# Altium PCB ByggernPCB_R01.PcbDoc
Units mm, origin at the board's own origin, x right, y up, seen from the top; angles counter-clockwise.
Board outline 121.2 x 94.85 mm, 2 copper layers (Top Layer, Bottom Layer), stack 0.325 mm thick; 47 components, 72 nets, 293 pads, 0 vias.
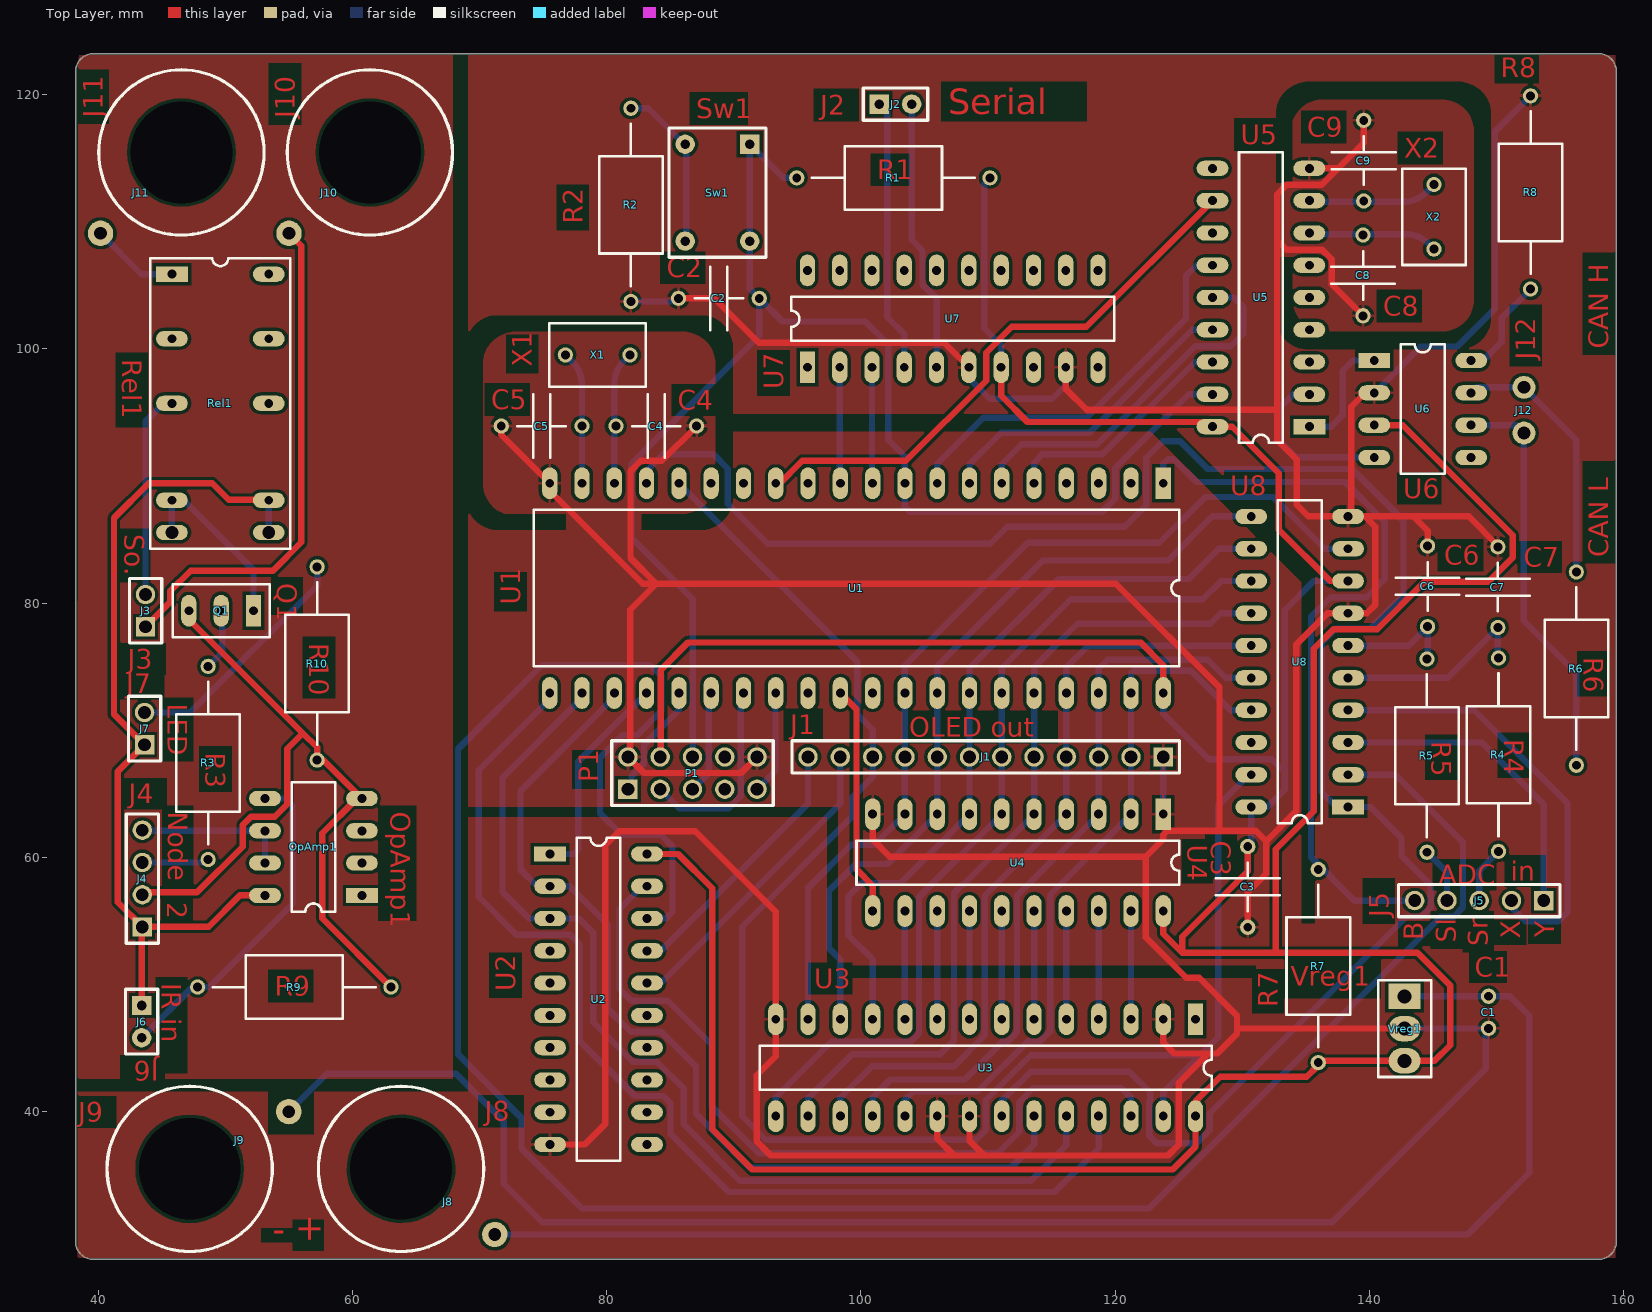
[diagram p0: Top Layer view]
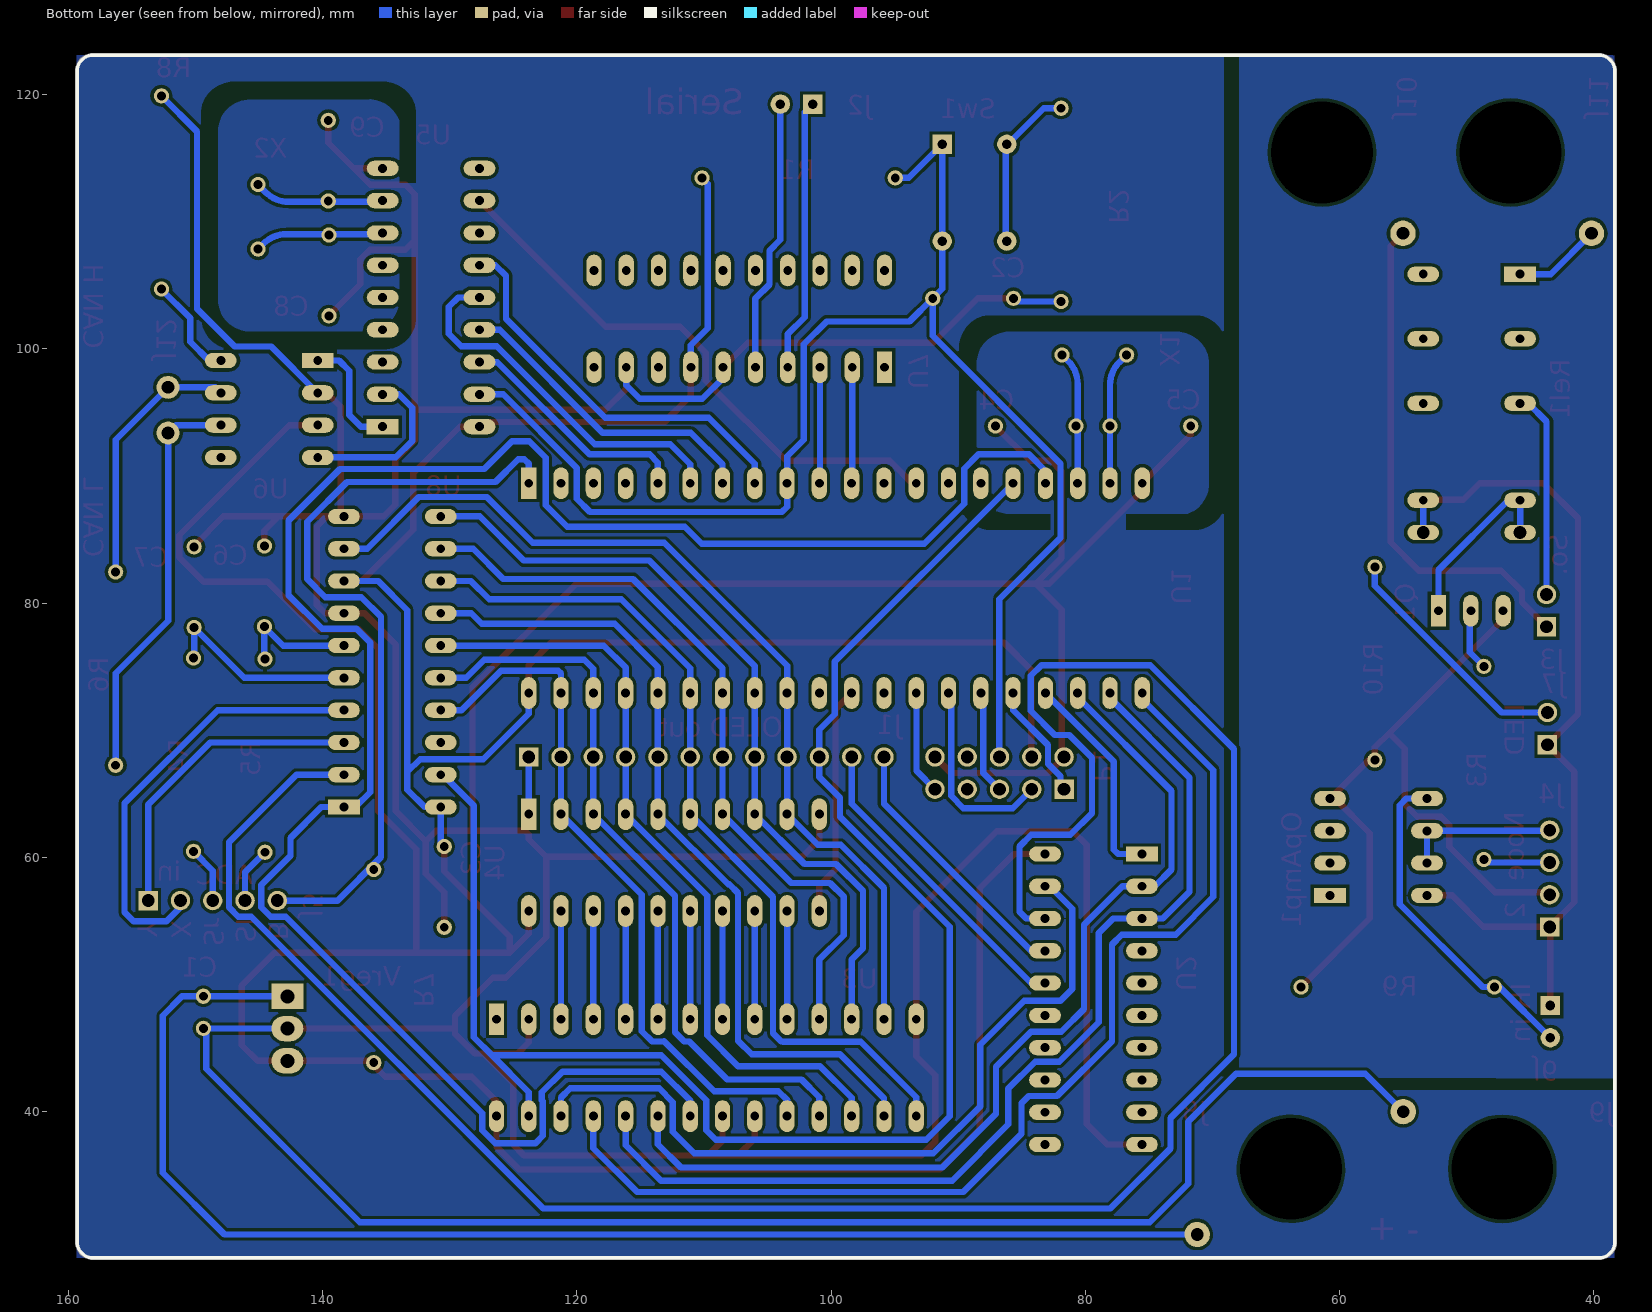
[diagram p1: Bottom Layer view, seen from below]

## Layer stack, top to bottom
Top Layer: signal copper 0.0356
Dielectric 1: core 0.254, FR-4, Dk 4.2
Bottom Layer: signal copper 0.0356

## Board outline
38.223,29.734 ccw(c39.62,29.77) 39.62,28.373 ccw(c39.62,28.5) 39.658,28.378 ccw(c39.695,28.5) 39.695,28.373 158.03,28.373 ccw(c158.03,29.77) 159.427,29.77 159.427,121.83 ccw(c158.03,121.83) 158.03,123.227 39.62,123.227 ccw(c39.62,121.83) 38.223,121.83 38.223,29.745 ccw(c38.35,29.745)

## Design rules (kind name [scope] priority, off if disabled: settings)
Clearance [All] p1: gap=0.254 ignorepadtopadclearanceinfootprint=FALSE except(0: Arc-Hole Track-Hole SMDPad-Hole THPad-Hole Via-Hole Fill-Hole Poly-Hole Region-Hole Text-Hole)
PolygonConnect [All] p1: connectstyle=Relief reliefconductorwidth=0.254 reliefentries=4 polygonreliefangle="90 Angle" airgapwidth=0.254
RoutingVias [All] p1: holewidth=0.711 width=1.27 viastyle="Through Hole" minholewidth=0.711 minwidth=1.27 maxholewidth=0.711 maxwidth=1.27
SolderMaskExpansion [All] p1: expansion=0.102
Width Width_1 [All] p1: maxlimit=1 minlimit=0.254 preferedwidth=0.5 minimp=50.000000 maximp=50.000000 favimp=50.000000
Width [All] p2: maxlimit=0.254 minlimit=0.254 preferedwidth=0.254
30 further rules are at their usual default settings.

## Components (designator, comment, footprint, x,y, rotation, side; value= is the part's Value field where it differs from the comment)
C1 "1uF" Capacitor#1 149.374,49.074 r270 top
C2 "100nF" Capacitor#2 92,103.975 r180 top
C3 "100nF" Capacitor#2 130.425,60.85 r270 top
C4 "22pF" Capacitor#2 80.725,93.925 r0 top
C5 "22pF" Capacitor#2 78.06,93.925 r180 top
C6 "100nF" Capacitor#2 144.575,78.15 r90 top
C7 "100nF" Capacitor#2 150.1,78.075 r90 top
C8 "22pF" Capacitor#2 139.5,108.95 r270 top
C9 "22pF" Capacitor#2 139.55,111.625 r90 top
J1 "Display" Header12 123.78,67.9 r180 top
J2 "Serial" Header2#1 101.45,119.25 r0 top
J3 "Solonoide" Header2#2 43.725,78.135 r90 top
J4 "Node2" Header4 43.475,54.52 r90 top
J5 "5 pin header" Header5 153.715,56.6 r180 top
J6 "IR In" Header2#1 43.425,48.35 r270 top
J7 "IR Out" Header2#2 43.65,68.86 r90 top
J8 "Banana" Banana-plug 63.825,35.5 r325 top
J9 "Banana" Banana-plug 47.2,35.5 r30 top
J10 "Banana" Banana-plug 61.375,115.45 r225 top
J11 "Banana" Banana-plug 46.55,115.45 r225 top
J12 "Screw-terminal" "Screw connector" 152.15,93.375 r90 top
OpAmp1 "MCP602" DIP8 60.745,57.01 r180 top
P1 "JTAG Header" Header5x2 81.67,65.36 r0 top
Q1 "MPSA56" SIP3#1 52.215,79.4 r270 top
R1 "10K" "Axial 0.6" 110.15,113.45 r180 top
R2 "100K" "Axial 0.6" 81.9,103.725 r90 top
R3 "1K" "Axial 0.6" 48.65,59.825 r90 top
R4 "2K" "Axial 0.6" 150.15,60.475 r90 top
R5 "2K" "Axial 0.6" 144.525,60.4 r90 top
R6 "120R" "Axial 0.6" 156.275,82.45 r270 top
R7 "10K" "Axial 0.6" 135.975,59.05 r270 top
R8 "10K" "Axial 0.6" 152.675,104.7 r90 top
R9 "1M" "Axial 0.6" 47.825,49.8 r0 top
R10 "47R" "Axial 0.6" 57.225,67.65 r90 top
Rel1 "5V Relay" DIP16-8 45.8,88.095 r0 top
Sw1 "Microswitch" Microswitch 88.715,113.555 r270 top
U1 "Atmega162" DIP40 123.78,89.431 r270 top
U2 "GAL" DIP20 75.55,60.27 r0 top
U3 "8Kx8 SRAM" DIP28 126.32,47.267 r270 top
U4 "Octal D Latch" DIP20 123.78,63.396 r270 top
U5 "CAN Controller" DIP18 135.275,93.88 r180 top
U6 "CAN Tranciever" DIP8 140.38,99.08 r0 top
U7 "Maxim RS232 Tranciever" DIP20 95.79,98.55 r90 top
U8 "8-bit ADC" DIP20 138.32,63.96 r180 top
Vreg1 "5V regulator" SIP3#2 142.766,49.074 r0 top
X1 "4.9152 MHz" Crystal 81.83,99.525 r180 top
X2 "16 MHz" Crystal 145.075,107.845 r90 top

## Footprints (in the part's own frame and the unit in brackets; to place one, negate y for a bottom-side part, rotate by r counter-clockwise, add the part's x,y. Pads: shape width x height; smd on the part's side, far side on the other; paste and mask are expansions set on the pad)
"Axial 0.6" [mm]
  round 1.2 hole 0.7: 1(0,0) 2(15.2,0)
  silkscreen extent 1.2,-2.5 14,2.5
Banana-plug [mm]
  round 2 hole 1: 1(9,0)
  round 0 hole 8: ""(0,0)
  silkscreen extent -6.5,-6.5 6.5,6.5
Capacitor#1 [mm]
  round 1.2 hole 0.7: 1(0,0) 2(2.525,0)
Capacitor#2 [mm]
  round 1.2 hole 0.7: 1(0,0) 2(6.35,0)
  silkscreen extent 1.27,-2.5 5.08,2.5
Crystal [mm]
  round 1.2 hole 0.7: 1(0,0) 2(5.08,0)
  silkscreen extent -1.25,-2.5 6.33,2.5
DIP8 [mm]
  rect 2.5x1.2 hole 0.7: 1(0,0)
  oval 2.5x1.2 hole 0.7: 2(0,-2.54) 3(0,-5.08) 4(0,-7.62) 5(7.62,-7.62) 6(7.62,-5.08) 7(7.62,-2.54) 8(7.62,0)
  silkscreen extent 2.08,-8.89 5.54,1.27
DIP16-8 [mm]
  rect 2.5x1.2 hole 0.7: 1(0,17.78)
  oval 2.5x1.2 hole 0.7: 2(0,12.7) 3(0,7.62) 4(0,0) 5(7.62,0) 6(7.62,7.62) 7(7.62,12.7) 8(7.62,17.78)
  oval 2.5x1.2 hole 1: 4(0,-2.54) 5(7.62,-2.54)
  silkscreen extent -1.69,-3.81 9.31,19.05
DIP18 [mm]
  rect 2.5x1.2 hole 0.7: 1(0,0)
  oval 2.5x1.2 hole 0.7: 2(0,-2.54) 3(0,-5.08) 4(0,-7.62) 5(0,-10.16) 6(0,-12.7) 7(0,-15.24) 8(0,-17.78) 9(0,-20.32) 10(7.62,-20.32) 11(7.62,-17.78) 12(7.62,-15.24) 13(7.62,-12.7) 14(7.62,-10.16) 15(7.62,-7.62) 16(7.62,-5.08) 17(7.62,-2.54) 18(7.62,0)
  silkscreen extent 2.08,-21.59 5.54,1.27
DIP20 [mm]
  rect 2.5x1.2 hole 0.7: 1(0,0)
  oval 2.5x1.2 hole 0.7: 2(0,-2.54) 3(0,-5.08) 4(0,-7.62) 5(0,-10.16) 6(0,-12.7) 7(0,-15.24) 8(0,-17.78) 9(0,-20.32) 10(0,-22.86) 11(7.62,-22.86) 12(7.62,-20.32) 13(7.62,-17.78) 14(7.62,-15.24) 15(7.62,-12.7) 16(7.62,-10.16) 17(7.62,-7.62) 18(7.62,-5.08) 19(7.62,-2.54) 20(7.62,0)
  silkscreen extent 2.08,-24.13 5.54,1.27
DIP28 [mm]
  rect 2.5x1.2 hole 0.7: 1(0,0)
  oval 2.5x1.2 hole 0.7: 2(0,-2.54) 3(0,-5.08) 4(0,-7.62) 5(0,-10.16) 6(0,-12.7) 7(0,-15.24) 8(0,-17.78) 9(0,-20.32) 10(0,-22.86) 11(0,-25.4) 12(0,-27.94) 13(0,-30.48) 14(0,-33.02) 15(7.62,-33.02) 16(7.62,-30.48) 17(7.62,-27.94) 18(7.62,-25.4) 19(7.62,-22.86) 20(7.62,-20.32) 21(7.62,-17.78) 22(7.62,-15.24) 23(7.62,-12.7) 24(7.62,-10.16) 25(7.62,-7.62) 26(7.62,-5.08) 27(7.62,-2.54) 28(7.62,0)
  silkscreen extent 2.08,-34.29 5.54,1.27
DIP40 [mm]
  rect 2.5x1.2 hole 0.7: 1(0,0)
  oval 2.5x1.2 hole 0.7: 2(0,-2.54) 3(0,-5.08) 4(0,-7.62) 5(0,-10.16) 6(0,-12.7) 7(0,-15.24) 8(0,-17.78) 9(0,-20.32) 10(0,-22.86) 11(0,-25.4) 12(0,-27.94) 13(0,-30.48) 14(0,-33.02) 15(0,-35.56) 16(0,-38.1) 17(0,-40.64) 18(0,-43.18) 19(0,-45.72) 20(0,-48.26) 21(16.5,-48.26) 22(16.5,-45.72) 23(16.5,-43.18) 24(16.5,-40.64) 25(16.5,-38.1) 26(16.5,-35.56) 27(16.5,-33.02) 28(16.5,-30.48) 29(16.5,-27.94) 30(16.5,-25.4) 31(16.5,-22.86) 32(16.5,-20.32) 33(16.5,-17.78) 34(16.5,-15.24) 35(16.5,-12.7) 36(16.5,-10.16) 37(16.5,-7.62) 38(16.5,-5.08) 39(16.5,-2.54) 40(16.5,0)
  silkscreen extent 2.08,-49.53 14.42,1.27
Header2#1 [mil]
  rect 60x60 hole 30: 1(0,0)
  round 60 hole 30: 2(100,0)
  silkscreen extent -50,-50 150,50
Header2#2 [mil]
  rect 60x60 hole 39.37: 1(0,0)
  round 60 hole 39.37: 2(100,0)
  silkscreen extent -50,-50 150,50
Header4 [mil]
  rect 60x60 hole 39.37: 1(0,0)
  round 60 hole 39.37: 2(100,0) 3(200,0) 4(300,0)
  silkscreen extent -50,-50 350,50
Header5 [mil]
  rect 60x60 hole 39.37: 1(0,0)
  round 60 hole 39.37: 2(100,0) 3(200,0) 4(300,0) 5(400,0)
  silkscreen extent -50,-50 450,50
Header5x2 [mil]
  rect 60x60 hole 39.37: 1(0,0)
  round 60 hole 39.37: 2(0,100) 3(100,0) 4(100,100) 5(200,0) 6(200,100) 7(300,0) 8(300,100) 9(400,0) 10(400,100)
  silkscreen extent -50,-50 450,150
Header12 [mil]
  rect 60x60 hole 39.37: 1(0,0)
  round 60 hole 39.37: 2(100,0) 3(200,0) 4(300,0) 5(400,0) 6(500,0) 7(600,0) 8(700,0) 9(800,0) 10(900,0) 11(1000,0) 12(1100,0)
  silkscreen extent -50,-50 1150,50
Microswitch [mil]
  rect 60x60 hole 30: 1(-100,100)
  round 60 hole 30: 1(200,100) 2(-100,-100) 2(200,-100)
  silkscreen extent -150,-150 250,150
"Screw connector" [mm]
  round 1.8 hole 1: 1(0,0) 2(3.6,0)
SIP3#1 [mm]
  rect 2.5x1.2 hole 0.7: 1(0,0)
  oval 2.5x1.2 hole 0.7: 2(0,-2.54) 3(0,-5.08)
  silkscreen extent -2.08,-6.35 2.08,1.27
SIP3#2 [mm]
  rect 2.5x2 hole 1.1: 1(0,0)
  oval 2.5x2 hole 1.1: 2(0,-2.54) 3(0,-5.08)
  silkscreen extent -2.08,-6.35 2.08,1.27

## Part data
C1 C2 C3 C4 C5 C6 C7 C8 C9: library part GenericCapacitor
J1: library part Header12
J2: library part Header2, PackageDocument=O, DatasheetDocument=1-Sep-1999, Gender=Receptacle, LatestRevisionDate=17-Jul-2002, LatestRevisionNote="Re-released for DXP Platform.", Orientation="Right Angle", PackageReference=788750, Positions=9, Published=15-Jun-2001, Publisher="Altium Limited"
J3 J6 J7: library part Header2
J4: library part Header4
J5: library part Header5
R1 R2 R3 R4 R5 R6 R7 R8 R9 R10: library part GenericResistor
Rel1: library part Relay
U2: library part GAL16V8
U3: library part IDT_7164SL
U4: library part SN74ALS573C
U5: library part MCP2515
U6: library part MCP2551
U7: library part MAX233
U8: library part ADC0844CCN
Vreg1: library part MC7805
X1 X2: library part GenericCrystal

## Nets (pads, with @x,y where several pads share a name; then routed paths per layer and width w, separated by ;. In a path a pad name is that pad's centre, name@x,y a point inside that pad or via, vN(x,y) a via of type N, cw(c..) or ccw(c..) an arc to the next point about the centre after c; other vN are vias at no path point)
0Vn2: J4.2 OpAmp1.4 Q1.3 R9.2 R10.1 | length 60.7
  Top Layer w0.5: J4.2 43.665,57.25 47.775,57.25 51.371,60.846 51.371,62.547 52.018,63.194 53.9,63.194 54.879,64.173 54.879,68.546 56.104,69.771 57.225,68.65 R10.1 57.725,67.65 OpAmp1.4 60.355,64.63 57.625,61.9 57.625,55.2 R9.2 ; Q1.3 47.135,78.74 56.1,69.775
5V: C3.1 P1.4 R1.1 R7.2 U1.40 U2.20 U3.28 U4.20 U5.18 U6.3 U7.7 U8.8 U8.20 Vreg1.3 | length 335.3
  Top Layer w0.5: U2.20 85.605,60.27 88.3,57.575 88.3,38.6 91.45,35.45 124.525,35.45 126.32,37.245 U3.28 126.32,40.82 128.25,42.75 135.075,42.75 R7.2@135.919,43.594 ; P1.4 84.244,67.934 84.244,74.744 86.4,76.9 122,76.9 123.78,75.12 U1.40 ; R1.1@109.926,113.226 R1.1 ; U7.7 111.03,96.32 113.1,94.25 127.285,94.25 U5.18 129.22,93.88 132.875,90.225 132.875,85.775 136.91,81.74 U8.8 ; U4.20 123.78,53.995 125.275,52.5 ; C3.1 130.425,58.9 125.275,53.75 125.275,52.5 ; R7.2@135.975,43.994 Vreg1.3 145.119,43.994 146.35,45.225 146.35,49.925 143.775,52.5 132.575,52.5 ; U6.3 142.621,94 151.275,85.346 151.275,83.583 149.367,81.675 144.325,81.675 140.6,77.95 137.175,77.95 135.625,76.4 135.625,63.625 132.629,60.629 132.629,52.554 132.575,52.5 ; 125.275,52.5 132.575,52.5
  Bottom Layer w0.5: R1.1@109.926,113.226 109.7,113 109.7,101.625 111.03,100.295 U7.7 ; U1.40 123.78,71.295 127.35,67.725 132.325,67.725 133.325,66.725 ; C3.1 130.7,61.125 U8.20 131.96,63.96 133.325,65.325 133.325,66.725 ; U8.8 135.615,81.74 133.325,79.45 133.325,66.725
5Vn2: J4.1 J6.1 J7.1 OpAmp1.8 Rel1.5 | length 68.5
  Top Layer w0.5: J6.1 43.425,54.47 J4.1 J4.1@43.49,54.535 ; OpAmp1.8 51.16,57.01 48.685,54.535 J4.1@43.49,54.535 ; Rel1.5@53.875,88.125 50.275,88.125 48.975,89.425 43.975,89.425 41.242,86.692 41.242,71.268 J7.1 41.55,66.76 41.55,56.475 J4.1@43.49,54.535
  Bottom Layer w0.5: Rel1.5@53.42,85.555 Rel1.5@53.42,88.095
ADC_CS: U2.18 U8.2 | length 182.4
  Bottom Layer w0.5: U2.18 84.64,55.19 85.175,55.725 85.175,60.85 84.25,61.775 81.175,61.775 79.475,63.475 79.475,67.825 81.275,69.625 82.4,69.625 84.3,71.525 84.3,74.275 83.45,75.125 74.9,75.125 68.3,68.525 68.3,44.5 73.3,39.5 73.3,37.1 78.025,32.375 122.65,32.375 145.609,55.334 146.619,55.334 147.339,56.054 147.35,56.054 147.361,56.065 147.361,61.189 142.05,66.5 U8.2
CAN_CLK: U1.8 U5.13 | length 31.6
  Bottom Layer w0.5: U1.8 106,90.95 109.625,94.575 117.775,94.575 125.575,102.375 125.575,105.75 126.405,106.58 U5.13
CAN_CS: U1.5 U5.16 | length 18.9
  Bottom Layer w0.5: U1.5 113.62,91.045 114.275,91.7 119,91.7 126.26,98.96 U5.16
CAN_RX0BF: U1.13 U5.11 | length 45.1
  Top Layer w0.5: U1.13@93.1,89.325 93.523,89.325 95.383,91.185 103.535,91.185 109.85,97.5 109.85,99.705 111.87,101.725 117.725,101.725 127.655,111.655 U5.11
CAN_SI: U1.6 U5.14 | length 29.6
  Bottom Layer w0.5: U1.6 111.08,90.93 112.65,92.5 118.6,92.5 126.3,100.2 129.1,100.2 130.075,101.175 130.075,103.3 129.335,104.04 U5.14
CAN_SO: U1.7 U5.15 | length 25
  Bottom Layer w0.5: U1.7 108.54,90.915 111.025,93.4 117.975,93.4 126.075,101.5 U5.15
GND: C1.2 C2.2 C3.2 C4.2 C5.2 C6.2 C7.2 C8.2 C9.2 J1.1 J9.1 P1.2 P1.10 R2.1 R8.2 U1.20 U2.10 U3.2 U3.14 U3.20 U3.21 U4.1 U4.10 U5.9 U6.2 U7.6 U7.9 U8.7 U8.10 Vreg1.2 | length 632.4
  Top Layer w0.5: C5.2 71.71,93.241 U1.20 75.52,88.83 82.825,81.525 83.9,81.525 ; U2.10 78.285,37.41 79.9,39.025 79.9,60.975 80.975,62.05 86.975,62.05 93.3,55.725 U3.14 93.3,44.35 91.8,42.85 91.8,37.65 92.9,36.55 107.325,36.55 ; C2.2 88.45,103.975 91.95,100.475 106.565,100.475 U7.6 ; C4.2 84.335,91.185 82.683,91.185 81.875,90.377 81.875,83.55 83.9,81.525 ; P1.10 90.564,66.634 82.936,66.634 P1.2 81.85,68.08 81.85,79.475 83.9,81.525 ; U4.10 100.92,61.405 102.275,60.05 122.4,60.05 ; U3.20 106,37.875 107.325,36.55 ; U3.21 108.54,37.71 109.7,36.55 ; U7.9 116.11,96.84 117.75,95.2 132.75,95.2 ; U3.2 123.78,45.445 124.65,44.575 127.325,44.575 ; C3.2 130.425,57.25 131.875,58.7 131.875,61.275 ; U5.9 137.55,114.2 ; C8.2 137.029,105.071 137.029,107.037 136.266,107.8 133.5,107.8 132.75,108.55 ; C9.2 139.55,116.2 137.55,114.2 ; U6.2 139.665,96.54 138.575,95.45 138.575,87.075 U8.10 135.18,86.82 134.275,87.725 134.275,91.3 132.75,92.825 132.75,95.2 ; Vreg1.2 129.584,46.534 ; C6.2 144.575,85.7 143.455,86.82 ; C7.2 150.1,84.525 147.805,86.82 143.455,86.82 ; 83.9,81.525 120.05,81.525 128.2,73.375 128.2,62.1 ; 107.325,36.55 109.7,36.55 ; 109.7,36.55 124.15,36.55 125,37.4 125,42.25 127.325,44.575 ; 122.4,60.05 122.4,53.725 125.6,50.525 126.6,50.525 129.584,47.541 129.584,46.534 ; 122.4,60.05 123.78,61.43 123.78,61.775 124.105,62.1 128.2,62.1 ; 127.325,44.575 128.025,44.575 129.584,46.134 129.584,46.534 ; 128.2,62.1 131.05,62.1 131.875,61.275 ; 131.875,61.275 134.25,63.65 134.25,76.75 136.7,79.2 U8.7 139.8,79.2 140.45,79.85 140.45,85.995 139.625,86.82 143.455,86.82 ; 132.75,95.2 132.75,108.55 ; 132.75,108.55 132.75,112.175 133.475,112.9 136.25,112.9 137.55,114.2
  Bottom Layer w0.5: J9.1 57.969,42.975 68.15,42.975 71.9,39.225 71.9,34.325 74.925,31.3 137.075,31.3 149.159,43.384 149.159,46.534 Vreg1.2 ; R2.1 85.4,103.725 C2.2 ; U7.6 108.49,97.71 110.125,96.075 115.05,96.075 116.11,97.135 U7.9 ; U4.1 J1.1 ; U6.2 140.403,96.54 144.047,100.184 146.909,100.184 149.875,103.15 149.875,117.1 R8.2
JoyButton: J5.5 R7.1 U1.1 | length 61.2
  Bottom Layer w0.5: U1.1 123.78,90.98 124.125,91.325 124.6,91.325 126.4,89.525 138.075,89.525 141.2,86.4 141.2,81.9 139.775,80.475 136.95,80.475 135.4,78.925 135.4,60.025 138.825,56.6 J5.5
NetC1_1: C1.1 J8.1 Vreg1.1 | length 106.2
  Bottom Layer w0.5: J8.1 147.713,30.338 152.575,35.2 152.575,47.55 151.051,49.074 C1.1 Vreg1.1
NetC4_1: C4.1 U1.18 X1.1 | length 10.5
  Bottom Layer w0.5: U1.18 80.6,97.243 cw(c83.14,97.243) 81.344,99.039 X1.1
NetC5_1: C5.1 U1.19 X1.2 | length 10.5
  Bottom Layer w0.5: X1.2 77.316,98.959 cw(c75.52,97.163) 78.06,97.163 C5.1 U1.19
NetC6_1: C6.1 R5.2 U8.6 | length 9.4
  Bottom Layer w0.5: U8.6 143.085,76.66 C6.1 144.575,75.65 R5.2
NetC7_1: C7.1 R4.2 U8.5 | length 15.8
  Bottom Layer w0.5: U8.5 146.145,74.12 C7.1 150.1,75.725 R4.2
NetC8_1: C8.1 U5.7 X2.1 | length 10.4
  Bottom Layer w0.5: U5.7@135.075,109.02 142.848,109.02 cw(c142.848,106.48) 144.644,108.276 X2.1
NetC9_1: C9.1 U5.8 X2.2 | length 9.9
  Bottom Layer w0.5: U5.8@135.6,111.56 142.658,111.56 ccw(c142.658,114.1) 144.454,112.304 X2.2
NetJ1_2: J1.2 U1.39 U3.19 U4.2 U8.17 | length 56.6
  Bottom Layer w0.5: U3.19 103.46,40.91 104.15,41.6 109.2,41.6 113.138,45.538 113.163,45.513 114.077,45.513 114.9,46.336 114.9,57.056 U4.2 J1.2 U1.39 121.24,74.465 121.46,74.685 125.965,74.685 129.07,71.58 U8.17
NetJ1_3: J1.3 U1.38 U3.18 U4.3 U8.16 | length 59.1
  Bottom Layer w0.5: U3.18 100.92,41.12 102.325,42.525 108.175,42.525 111.163,45.513 111.537,45.513 112.275,46.251 112.275,56.971 U4.3 J1.3 U1.38 118.7,74.825 119.425,75.55 127.275,75.55 128.705,74.12 U8.16
NetJ1_4: J1.4 U1.37 U3.17 U4.4 U8.15 | length 61.7
  Bottom Layer w0.5: U3.17 98.38,41.08 100.875,43.575 107.325,43.575 109.75,46 109.75,56.986 U4.4 J1.4 U1.37 116.16,74.935 117.885,76.66 U8.15
NetJ1_5: J1.5 U1.36 U3.16 U4.5 U8.14 | length 65.6
  Bottom Layer w0.5: U3.16 95.84,41.04 99.3,44.5 106.25,44.5 107.325,45.575 107.325,57.2 108,57.875 108.099,57.875 U4.5 J1.5 U1.36 113.62,74.97 117.025,78.375 127.475,78.375 128.3,79.2 U8.14
NetJ1_6: J1.6 U1.35 U3.15 U4.6 U8.13 | length 68.7
  Bottom Layer w0.5: U3.15 93.3,41.125 97.675,45.5 103.775,45.5 103.788,45.513 103.917,45.513 104.564,46.16 104.564,56.88 U4.6 J1.6 U1.35 111.08,74.88 116.5,80.3 126.9,80.3 128.34,81.74 U8.13
NetJ1_7: J1.7 U1.34 U3.11 U4.7 U8.12 | length 61.2
  Bottom Layer w0.5: U3.11 100.92,51.966 99.015,53.871 99.015,56.919 100.079,57.983 103.127,57.983 U4.7 ; U4.7@108.54,62.38 U4.7 ; U8.12 128.155,84.28 125.775,81.9 115.575,81.9 108.54,74.865 U1.34 J1.7 U4.7
NetJ1_8: J1.8 U1.33 U3.12 U4.8 U8.11 | length 63.5
  Bottom Layer w0.5: U3.12@98.38,47.521 98.38,51.966 97.491,52.855 97.491,57.366 99.608,59.483 102.087,59.483 U4.8 ; U4.8@106,62.38 U4.8 ; U8.11 127.645,86.82 124.175,83.35 114.3,83.35 106,75.05 U1.33 J1.8 U4.8
NetJ1_9: J1.9 U1.32 U3.13 U4.9 U8.9 | length 75.1
  Bottom Layer w0.5: U3.13 95.84,57.59 99.233,60.983 101.047,60.983 U4.9 ; U4.9@103.46,62.38 U4.9 ; U8.9 136.495,84.28 132.425,88.35 127.075,88.35 123.475,84.75 113.125,84.75 103.46,75.085 U1.32 J1.9 U4.9
NetJ2_1: J2.1 U7.4 | length 21.5
  Bottom Layer w0.5: J2.1 102.075,118.625 102.075,102.5 103.41,101.165 U7.4
NetJ2_2: J2.2 U7.5 | length 21.5
  Bottom Layer w0.5: J2.2 103.99,108.585 104.846,107.729 104.846,105.063 105.95,103.959 U7.5
NetJ3_1: J3.1 J10.1 | length 40.2
  Top Layer w0.5: J3.1 45.65,80.06 45.65,80.925 47.275,82.55 53.75,82.55 55.975,84.775 55.975,108.122 J10.1
NetJ3_2: J3.2 Rel1.3 | length 15.7
  Bottom Layer w0.5: J3.2 43.725,94.29 Rel1.3@45.2,95.765
NetJ4_3: J4.3 R3.1 | length 4.8
  Bottom Layer w0.5: J4.3 R3.1@48.275,59.6
NetJ4_4: J4.4 OpAmp1.6 OpAmp1.7 | length 12.2
  Bottom Layer w0.5: J4.4@43.475,62.09 OpAmp1.6 OpAmp1.7
NetJ5_1: J5.1 U8.3 | length 25
  Bottom Layer w0.5: U8.3 148.835,69.04 153.715,64.16 J5.1
NetJ5_2: J5.2 U8.4 | length 34.5
  Bottom Layer w0.5: U8.4 148.245,71.58 155.575,64.25 155.575,55.675 154.875,54.975 152.275,54.975 151.175,56.075 J5.2
NetJ5_3: J5.3 R4.1 | length 4.5
  Bottom Layer w0.5: J5.3 148.635,58.96 R4.1
NetJ5_4: J5.4 R5.1 | length 4.5
  Bottom Layer w0.5: R5.1 146.095,58.83 J5.4
NetJ6_2: J6.2 OpAmp1.5 R9.1 | length 26.3
  Bottom Layer w0.5: J6.2 47.415,49.8 R9.1 48.75,49.8 55.275,56.325 55.275,64.1 54.745,64.63 OpAmp1.5
NetJ7_2: J7.2 R10.2 | length 19.2
  Bottom Layer w0.5: J7.2 47.25,71.4 57.225,81.375 R10.2
NetJ11_1: J11.1 Rel1.1 | length 6.9
  Bottom Layer w0.5: J11.1 43.397,105.875 Rel1.1
NetJ12_1: J12.1 R6.2 U6.6 | length 32.2
  Bottom Layer w0.5: U6.6 151.525,94 J12.1 152.15,78.6 156.275,74.475 R6.2
NetJ12_2: J12.2 R6.1 U6.7 | length 20.6
  Bottom Layer w0.5: U6.7 148.435,96.975 J12.2 156.275,92.85 R6.1
NetP1_1: P1.1 U1.25 | length 9.2
  Bottom Layer w0.5: P1.1 81.95,65.64 81.95,66.39 82.936,67.376 82.936,68.836 85.68,71.58 U1.25
NetP1_3: P1.3 U1.27 | length 15.5
  Bottom Layer w0.5: P1.3 85.695,63.875 89.595,63.875 90.556,64.836 90.556,72.727 U1.27
NetP1_5: P1.5 U1.26 | length 8.2
  Bottom Layer w0.5: P1.5 88.024,66.634 88.024,68.425 88.025,68.426 88.025,72.736 U1.26
NetP1_9: P1.9 U1.28 | length 8.2
  Bottom Layer w0.5: P1.9 93.275,66.805 93.275,72.906 U1.28
NetQ1_1: Q1.1 Rel1.4 | length 14.4
  Bottom Layer w0.5: Rel1.4@45.8,85.555 45.8,88.095 46.73,88.095 52.215,82.61 Q1.1
NetQ1_2: Q1.2 R3.2 | length 5
  Bottom Layer w0.5: R3.2 49.75,76.125 Q1.2@49.75,79.6
NetR2_2: R2.2 Sw1.2 | length 13.1
  Bottom Layer w0.5: R2.2 83.275,118.925 86.252,115.948 86.252,108.552 Sw1.2@86.175,108.475
NetR8_1: R8.1 U6.8 | length 8.1
  Bottom Layer w0.5: U6.8 148.93,99.08 150.4,100.55 150.4,102.425 R8.1
NetU1_10: U1.10 U7.3 | length 9.1
  Bottom Layer w0.5: U7.3 100.87,89.481 U1.10
NetU1_11: U1.11 U7.2 | length 9.1
  Bottom Layer w0.5: U7.2 98.33,89.481 U1.11
NetU1_21: U1.21 U3.25 | length 86.6
  Bottom Layer w0.5: U1.21 75.52,72.445 69.925,66.85 69.925,56.9 72.9,53.925 77.125,53.925 77.9,53.15 77.9,45.549 82.224,41.225 84.45,41.225 85.025,40.65 85.025,38.25 89.6,33.675 115.25,33.675 118.7,37.125 U3.25
NetU1_22: U1.22 U2.3 U3.24 | length 81.2
  Bottom Layer w0.5: U1.22 78.06,72.535 71.8,66.275 71.8,57.3 73.91,55.19 U2.3 77.81,55.19 78.95,54.05 78.95,47.039 82.063,43.926 83.945,43.926 86.05,41.821 86.05,39 90.475,34.575 113.375,34.575 116.16,37.36 U3.24
NetU1_23: U1.23 U2.2 U3.23 | length 76.1
  Bottom Layer w0.5: U1.23 80.6,72.6 73.225,65.225 73.225,59.05 74.545,57.73 U2.2 77.07,57.73 80.1,54.7 80.1,48.075 81.9,46.275 84.275,46.275 87.025,43.525 87.025,39.825 91.25,35.6 111.8,35.6 113.62,37.42 U3.23
NetU1_24: U1.24 U2.1 | length 16.9
  Bottom Layer w0.5: U2.1 77.42,60.27 77.75,60.6 77.75,67.541 U1.24
NetU1_30: U1.30 U4.11 | length 18.2
  Top Layer w0.5: U1.30 99.646,71.665 99.646,59.054 100.92,57.78 U4.11
NetU3_3: U3.3 U4.19 | length 8.8
  Bottom Layer w0.5: U3.3@121.24,47.013 U3.3 U4.19
NetU3_4: U3.4 U4.18 | length 8.8
  Bottom Layer w0.5: U3.4@118.7,47.013 U3.4 U4.18
NetU3_5: U3.5 U4.17 | length 8.8
  Bottom Layer w0.5: U3.5@116.16,47.013 U3.5 U4.17
NetU3_6: U3.6 U4.16 | length 8.8
  Bottom Layer w0.5: U3.6@113.62,47.013 U3.6 U4.16
NetU3_7: U3.7 U4.15 | length 8.8
  Bottom Layer w0.5: U3.7@111.08,47.013 U3.7 U4.15
NetU3_8: U3.8 U4.14 | length 8.8
  Bottom Layer w0.5: U3.8@108.54,47.013 U3.8 U4.14
NetU3_9: U3.9 U4.13 | length 8.8
  Bottom Layer w0.5: U3.9@106,47.013 U3.9 U4.13
NetU3_10: U3.10 U4.12 | length 8.8
  Bottom Layer w0.5: U3.10@103.46,47.013 U3.10 U4.12
NetU5_1: U5.1 U6.1 | length 9.3
  Bottom Layer w0.5: U5.1 136.98,93.88 137.9,94.8 137.9,98.275 138.705,99.08 U6.1
NetU5_2: U5.2 U6.4 | length 13.3
  Bottom Layer w0.5: U5.2 133.995,96.42 132.95,95.375 132.95,92.75 134.24,91.46 U6.4
OLED_CS: J1.11 U2.16 | length 24.7
  Bottom Layer w0.5: U2.16 84.26,50.11 98.38,64.23 J1.11
OLED_DC\: J1.12 U2.17 | length 21.1
  Bottom Layer w0.5: U2.17 84.275,52.65 95.84,64.215 J1.12
R\e\s\e\t\: C2.1 P1.6 R1.2 Sw1.1 U1.9 U5.17 | length 114.1
  Bottom Layer w0.5: P1.6 86.784,67.934 86.784,80.316 81.95,85.15 81.95,90.975 92,101.025 C2.1 ; R1.2 93.9,113.45 91.255,116.095 91.255,108.475 91.255,104.72 C2.1 ; U5.17 125.795,96.42 120,90.625 120,88.2 118.965,87.165 103.885,87.165 103.46,87.59 U1.9 103.46,91.54 102.15,92.85 102.15,100.35 100.35,102.15 93.825,102.15 C2.1
RdStrobe: U1.17 U3.22 U8.1 | length 161.8
  Bottom Layer w0.5: U1.17 83.14,90.415 84.425,91.7 88.4,91.7 89.525,90.575 89.525,87.825 92.675,84.675 110.175,84.675 111.5,86 120.75,86 122.45,87.7 122.45,91.425 123.75,92.725 125.1,92.725 127.275,90.55 138.625,90.55 142.675,86.5 142.675,80.625 140.025,77.975 137.325,77.975 136.25,76.9 136.25,65.125 137.415,63.96 U8.1 140.09,63.96 142.525,61.525 142.525,60.125 144.825,57.825 144.825,56.08 144.079,55.334 142.884,55.334 127.424,39.874 127.424,38.54 126.409,37.525 123.25,37.525 122.676,38.099 122.676,40.828 122.75,40.902 122.75,41.525 121.125,43.15 113.35,43.15 111.08,40.88 U3.22@111.08,40.1
SRAM_CS: U2.19 U3.26 | length 62.8
  Bottom Layer w0.5: U2.19 82.805,57.73 81.025,55.95 81.025,49.65 81.95,48.725 84.8,48.725 88.275,45.25 88.275,40.4 91.95,36.725 110.75,36.725 112.45,38.425 112.45,40.75 113.525,41.825 120.525,41.825 121.24,41.11 U3.26
WrStrobe: J1.10 U1.16 U3.27 U8.19 | length 131.1
  Bottom Layer w0.5: U1.16 99.7,75.411 99.7,71.25 100.92,70.03 J1.10 100.92,66.32 99.3,64.7 99.3,63.2 90.65,54.55 90.65,39.65 92.525,37.775 109.075,37.775 109.825,38.525 109.825,40.9 113.35,44.425 126.675,44.425 ; U3.27 123.78,41.53 126.675,44.425 ; U8.19 130.525,66.5 128.1,64.075 128.1,45.85 126.675,44.425
pads on no net: J8. J9. J10. J11. OpAmp1.1 OpAmp1.2 OpAmp1.3 P1.7 P1.8 Rel1.2 Rel1.6 Rel1.7 Rel1.8 U1.2 U1.3 U1.4 U1.12 U1.14 U1.15 U1.29 U1.31 U2.4 U2.5 U2.6 U2.7 U2.8 U2.9 U2.11 U2.12 U2.13 U2.14 U2.15 U3.1 U5.3 U5.4 U5.5 U5.6 U5.10 U5.12 U6.5 U7.1 U7.8 U7.10 U7.11 U7.12 U7.13 U7.14 U7.15 U7.16 U7.17 U7.18 U7.19 U7.20 U8.18

## Polygon pours and split planes (outlines as drawn)
no net on Bottom Layer "Bottom" (solid, pour order 2): 38.4,123.15 38.4,28.5 159.325,28.5 159.325,123.1 38.5,123.1
GND on Top Layer "GND" (solid, pour order 0): 38.45,122.4 38.4,28.5 159.325,28.5 159.325,123.1 38.5,123.1

## Other copper
Top Layer:
  pour cut-out: 53.325,41.875 53.325,38.2 57,38.2 57,41.85
  pour cut-out: 67.9,123.227 69.1,123.227 69.1,41.55 38.223,41.55 38.223,42.6 67.9,42.6
  pour cut-out: 69,64 98.225,64 98.225,51.525 131.1,51.525 131.1,50.475 97.325,50.475 97.325,63.175 69,63.175
  pour cut-out: 89.925,94.9 123.575,94.9 135.725,82.75 135.725,54.775 134.65,54.775 134.65,81.625 122.8,93.475 89.925,93.475
  pour cut-out: 82.7,85.75 87.41,85.75 ccw(c87.41,88.29) 89.95,88.29 89.95,100.11 ccw(c87.41,100.11) 87.41,102.65 71.44,102.65 ccw(c71.44,100.11) 68.9,100.11 68.9,88.29 ccw(c71.44,88.29) 71.44,85.75 76.825,85.75 76.825,87.025 71.955,87.025 cw(c72.815,89.415) 70.275,89.415 70.275,98.81 cw(c72.815,98.81) 72.815,101.35 86.01,101.35 cw(c86.01,98.81) 88.55,98.81 88.55,89.565 cw(c86.01,89.565) 86.01,87.025 82.7,87.025
  pour cut-out: 132.65,107.2 132.65,102.49 ccw(c135.19,102.49) 135.19,99.95 147.01,99.95 ccw(c147.01,102.49) 149.55,102.49 149.55,118.46 ccw(c147.01,118.46) 147.01,121 135.19,121 ccw(c135.19,118.46) 132.65,118.46 132.65,113.075 133.925,113.075 133.925,117.945 cw(c136.315,117.085) 136.315,119.625 145.71,119.625 cw(c145.71,117.085) 148.25,117.085 148.25,103.89 cw(c145.71,103.89) 145.71,101.35 136.465,101.35 cw(c136.465,103.89) 133.925,103.89 133.925,107.2
  text "Serial" at 106.875,118.45 h2
  text "CAN H" at 158.775,100 h1.52 r90
  text "So." at 42.1,85.4 h1.52 r270
  text "CAN L" at 158.775,83.6 h1.52 r90
  text "LED" at 45.475,72.1 h1.52 r270
  text "OLED out" at 103.8,69.5 h1.52
  text "Node" at 45.5,63.6 h1.52 r270
  text "in" at 151.125,58.175 h1.52
  text "ADC" at 145.45,57.875 h1.52
  text "2" at 45.45,56.475 h1.52 r270
  text "Y" at 154.525,53.725 h1.52 r90
  text "X" at 151.85,53.6 h1.52 r90
  text "B" at 144.25,53.5 h1.52 r90
  text "Sl" at 146.8,53.275 h1.52 r90
  text "Sr" at 149.325,53 h1.52 r90
  text "IR in" at 45,50.1 h1.52 r270
  text "-" at 54.7,31.275 h2 r180
  text "+" at 57.525,29.625 h2 r90
Bottom Layer:
  pour cut-out: 67.875,123.227 69.1,123.227 69.1,41.675 38.223,41.675 38.223,42.6 67.875,42.7 67.875,97.2
  pour cut-out: 82.7,85.75 87.41,85.75 ccw(c87.41,88.29) 89.95,88.29 89.95,100.11 ccw(c87.41,100.11) 87.41,102.65 71.44,102.65 ccw(c71.44,100.11) 68.9,100.11 68.9,88.29 ccw(c71.44,88.29) 71.44,85.75 76.825,85.75 76.825,87.025 71.955,87.025 cw(c72.815,89.415) 70.275,89.415 70.275,98.81 cw(c72.815,98.81) 72.815,101.35 86.01,101.35 cw(c86.01,98.81) 88.55,98.81 88.55,89.565 cw(c86.01,89.565) 86.01,87.025 82.7,87.025
  pour cut-out: 132.65,107.2 132.65,102.49 ccw(c135.19,102.49) 135.19,99.95 147.01,99.95 ccw(c147.01,102.49) 149.55,102.49 149.55,118.46 ccw(c147.01,118.46) 147.01,121 135.19,121 ccw(c135.19,118.46) 132.65,118.46 132.65,113.075 133.925,113.075 133.925,117.945 cw(c136.315,117.085) 136.315,119.625 145.71,119.625 cw(c145.71,117.085) 148.25,117.085 148.25,103.89 cw(c145.71,103.89) 145.71,101.35 136.465,101.35 cw(c136.465,103.89) 133.925,103.89 133.925,107.2

## Silkscreen, mask and mechanical layers (free items; w line width, h text height)
Bottom Overlay 1:
  lines w0.254: 49.975,28.5 158.03,28.5 ccw(c158.03,29.77) 159.3,29.77 159.3,121.83 ccw(c158.03,121.83) 158.03,123.1 39.62,123.1 ccw(c39.62,121.83) 38.35,121.83 38.35,29.77 ccw(c39.62,29.77) 39.62,28.5 50.05,28.5